# Altium PCB PCB1.PcbDoc
Units mil, origin at the board's own origin, x right, y up, seen from the top; angles counter-clockwise.
Board outline 3205.03 x 2070.03 mil, 2 copper layers (Top Layer, Bottom Layer); 42 components, 32 nets, 168 pads, 42 vias.
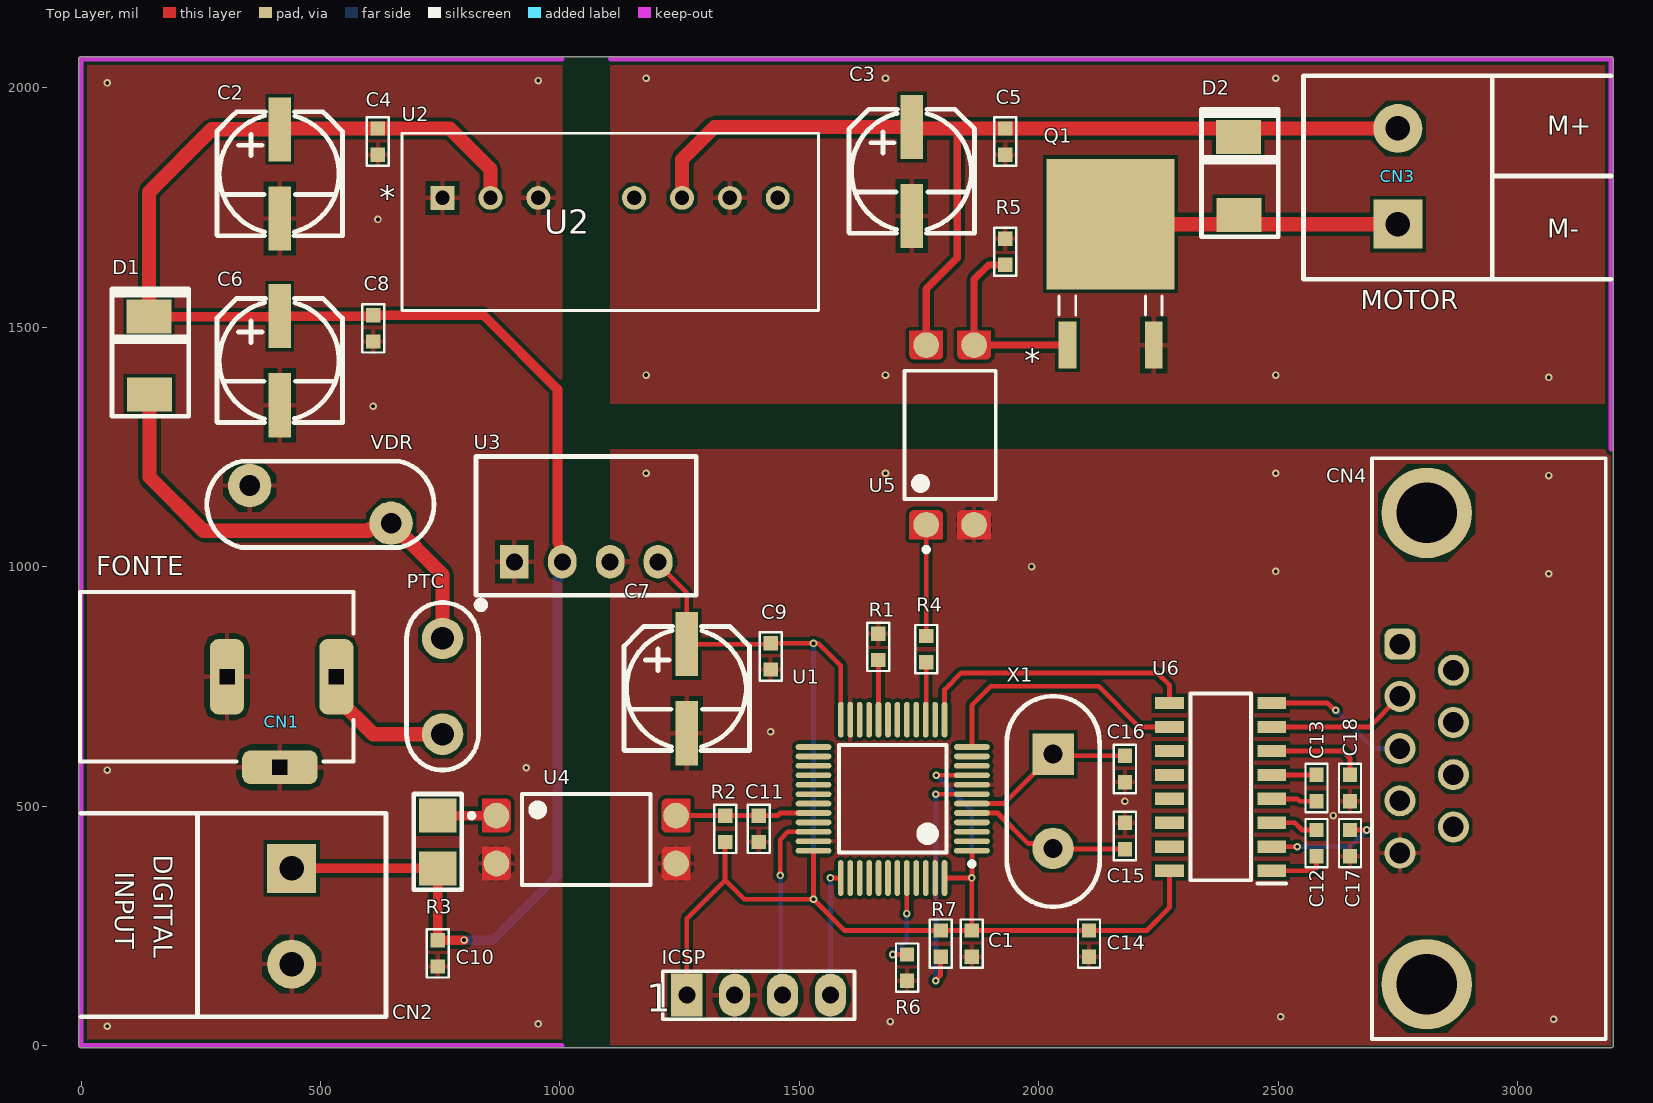
[diagram p0: Top Layer view]
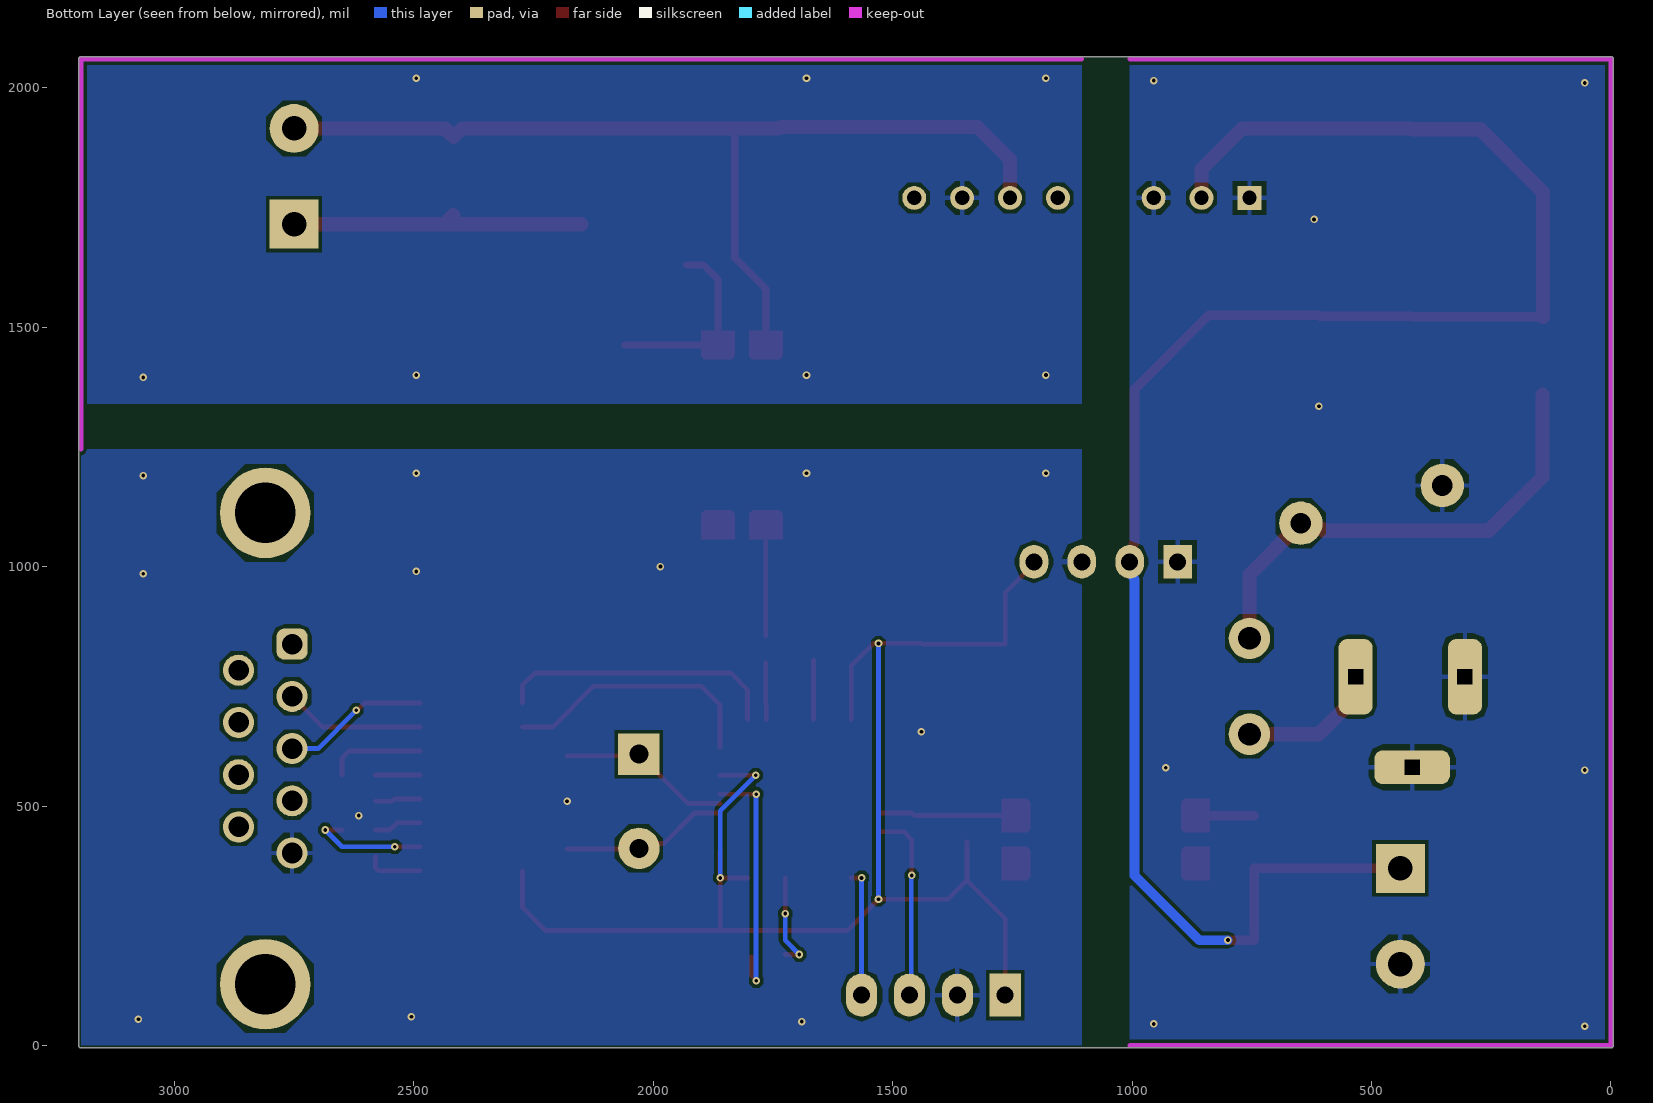
[diagram p1: Bottom Layer view, seen from below]

## Layer stack, top to bottom
Top Solder: solder mask 0.4, Solder Resist, Dk 3.5
Top Layer: signal copper 1.4
Dielectric 1: dielectric 12.6, FR-4, Dk 4.8
Bottom Layer: signal copper 1.4
Bottom Solder: solder mask 0.4, Solder Resist, Dk 3.5

## Board outline
-5.02,0 -5.01,2060 cw(c0,2060) 0,2065.02 3195,2065.02 cw(c3195,2060) 3200.02,2060 3200.02,0 cw(c3195,0) 3195,-5.01 0,-5.02 cw(c0,0)

## Design rules (kind name [scope] priority, off if disabled: settings)
Clearance [All] p1: gap=7 ignorepadtopadclearanceinfootprint=FALSE
PolygonConnect [All] p1: thpad.connectstyle=Relief thpad.reliefconductorwidth=10 thpad.reliefentries=4 thpad.polygonreliefangle="90 Angle" thpad.airgapwidth=10 smdpad.connectstyle=Relief smdpad.reliefconductorwidth=10 smdpad.reliefentries=4 smdpad.polygonreliefangle="90 Angle" smdpad.airgapwidth=10 via.connectstyle=Direct via.reliefconductorwidth=10 via.reliefentries=4 via.polygonreliefangle="90 Angle" via.airgapwidth=10
RoutingVias [All] p1: holewidth=28 width=50 viastyle="Through Hole" minholewidth=28 minwidth=50 maxholewidth=28 maxwidth=50
SolderMaskExpansion [All] p1: expansion=4 istentingtop=FALSE
Width [All] p1: maxlimit=40 minlimit=10 preferedwidth=10
30 further rules are at their usual default settings.

## Classes and differential pairs
component class Sheet2: C1 C12 C13 C14 C15 C16 C17 C18 CN4 ICSP R1 R6 R7 U1 U6 X1
component class Sheet1: C2 C3 C4 C5 C6 C7 C8 C9 C10 C11 CN1 CN2 CN3 D1 D2 PTC Q1 R2 R3 R4 R5 U2 U3 U4 U5 VDR

## Components (designator, comment, footprint, x,y, rotation, side; value= is the part's Value field where it differs from the comment)
C1 "100nF/100V" 0603C-GENERIC 1860,215 r180 top
C2 "10uF/50V" "CapE SMD D6.3 L5.8" 415,1820 r0 top
C3 "10uF/50V" "CapE SMD D6.3 L5.8" 1735,1825 r0 top
C4 "100nF/100V" 0603C-GENERIC 620,1890 r180 top
C5 "100nF/100V" 0603C-GENERIC 1930,1890 r180 top
C6 "10uF/50V" "CapE SMD D6.3 L5.8" 415,1430 r0 top
C7 "10uF/50V" "CapE SMD D6.3 L5.8" 1265,745 r0 top
C8 "100nF/100V" 0603C-GENERIC 610,1500 r180 top
C9 "100nF/100V" 0603C-GENERIC 1440,815 r180 top
C10 "100nF/100V" 0603C-GENERIC 745,195 r180 top
C11 "100nF/100V" 0603C-GENERIC 1415,455 r180 top
C12 "100nF/100V" 0603C-GENERIC 2580,425 r180 top
C13 "100nF/100V" 0603C-GENERIC 2580,540 r180 top
C14 "100nF/100V" 0603C-GENERIC 2105,210 r0 top
C15 "12pF/50V" 0603C-GENERIC 2180,435 r0 top
C16 "12pF/50V" 0603C-GENERIC 2180,580 r180 top
C17 "100nF/100V" 0603C-GENERIC 2650,420 r0 top
C18 "100nF/100V" 0603C-GENERIC 2650,535 r0 top
CN1 "FONTE" "Power Jack 694106301002" 283.35,770 r270 top
CN2 "BOTAO" AKZ700/2 440,270 r270 top
CN3 "MOTOR" AKZ700/2 2750,1815 r90 top
CN4 "DB9" 618009231121 2940,620 r90 top
D1 "MBRS360BT3G" DO-214AA(SMB) 145,1440 r90 top
D2 "MBRS360BT3G" DO-214AA(SMB) 2420,1815 r90 top
ICSP "Gravação in circuit" "BP 1x4" 1415,105 r0 top
PTC "0ZRN0100FF1E" "PTC LVR" 755,750 r90 top
Q1 "STD5NM50AG" DPAK-3_ONS 2150,1715 r0 top
R1 "10K" 0603R 1665,835 r180 top
R2 "10K" 0603R 1345,455 r180 top
R3 "470" "Res 1206" 745,425 r270 top
R4 "220R" 0603R 1765,830 r180 top value=10K
R5 "10K" 0603R 1930,1660 r180 top
R6 "10K" 0603R 1725,160 r0 top
R7 "10K" 0603R 1795,210 r0 top
U1 "STM32F103CBT6" LQFP-48 1695,515 r180 top value=STM32F103C8T6
U2 "ITQ2424SA" SIP8_ITQ2424_XPR 755,1770 r0 top
U3 "IL2405S" "IL SERIES" 1055,1010 r0 top
U4 "SFH618" FP-83911-MFG 1055,430 r0 top
U5 "SFH618" FP-83911-MFG 1815,1275 r90 top
U6 "MAX3232CSE" SOIC127P600X175-16N 2380,540 r180 top
VDR "S10K30" "VDR D12H14.5-7.5" 500,1130 r0 top
X1 "8MHz" "Cristal HC49S" 2030,510 r270 top

## Footprints (in the part's own frame and the unit in brackets; to place one, negate y for a bottom-side part, rotate by r counter-clockwise, add the part's x,y. Pads: shape width x height; smd on the part's side, far side on the other; paste and mask are expansions set on the pad)
0603C-GENERIC [mil]
  rect 30x30 smd: 1(0,30) 2(0,-25)
  silkscreen extent -23,-48 23,53, body extent -16,-28 16,34, height 12
0603R [mil]
  rect 30x30 smd: 1(0,30) 2(0,-25)
  silkscreen extent -23,-48 23,53, body extent -16,-31 16,32, height 18
618009231121 [mm] "9 pins, right angled, 8.08mm, with hex screw"
  rrect50% 1.65x1.65 hole 1.09: 1(5.54,4.72)
  round 1.65 hole 1.09: 2(2.77,4.72) 3(0,4.72) 4(-2.77,4.72) 5(-5.54,4.72) 6(4.155,1.88) 7(1.385,1.88) 8(-1.385,1.88) 9(-4.155,1.88)
  round 4.8 hole 3.2: M1(-12.5,3.3) M2(12.5,3.3)
  silkscreen extent -15.4,-6.2 15.4,6.2, body extent -15.4,-12.2 15.4,6.2, height 12.55
AKZ700/2 [mm]
  rect 2.6x2.6 hole 1.3: 1(-2.54,0)
  round 2.6 hole 1.3: 2(2.54,0)
  silkscreen extent -5.46,-5 5.33,5, body extent -5.53,-4.95 5.28,5.55, height 19.2
"BP 1x4" [mil]
  rect 65x90 hole 35.43: 1(-150,0)
  oval 65x90 hole 35.43: 2(-50,0) 3(50,0) 4(150,0)
  silkscreen extent -200,-50 200,50, body extent -200,-50 200,50, height 234
"CapE SMD D6.3 L5.8" [mm]
  rect 1.2x3.4 smd: 1(0,2.362) 2(0,-2.362)
  silkscreen extent -3.33,-3.28 3.33,3.3, body extent -3.3,-3.5 3.3,3.5, height 5.4
"Cristal HC49S" [mm]
  rect 2.2x2.2 hole 1: 1(-2.5,0)
  round 2.2 hole 1: 2(2.5,0)
  silkscreen extent -5.57,-2.46 5.6,2.47, body extent -5.68,-2.29 5.68,2.36, height 3.5
DO-214AA(SMB) [mil]
  rect 70.87x94.49 smd: 1(-81,2) 2(82,3)
  silkscreen extent -126,-80 140,80, body extent -110,-75 110,80, height 110
DPAK-3_ONS [mil]
  rect 37x98 smd paste+0 mask+0: 1(-90.16,-252.5) 2(90.16,-252.5)
  rect 267x273 smd paste+0 mask+0: 3(0,0)
  silkscreen extent -108,-190 108,-150, body extent -133,-288 133,123, height 67
FP-83911-MFG [mm]
  round 1.368 smd paste+0 mask+0: 1(-4.765,1.27) 2(-4.765,-1.27) 3(4.765,-1.27) 4(4.765,1.27)
  Top Layer region: -5.525,2.16 -4.255,2.16 -4.159,2.141 -4.078,2.087 -4.024,2.006 -4.005,1.91 -4.005,1.91 -4.005,0.63 -4.038,0.505 -4.13,0.413 -4.255,0.38 -4.255,0.38 -5.525,0.38
  Top Layer region: -5.525,-0.38 -4.255,-0.38 -4.159,-0.399 -4.078,-0.453 -4.024,-0.534 -4.005,-0.63 -4.005,-0.63 -4.005,-1.91 -4.024,-2.006 -4.078,-2.087 -4.159,-2.141 -4.255,-2.16 -4.255,-2.16 -5.525,-2.16
  Top Layer region: 5.525,-2.16 4.255,-2.16 4.159,-2.141 4.078,-2.087 4.024,-2.006 4.005,-1.91 4.005,-1.91 4.005,-0.63 4.024,-0.534 4.078,-0.453 4.159,-0.399 4.255,-0.38 4.255,-0.38 5.525,-0.38
  Top Layer region: 5.525,0.38 4.255,0.38 4.159,0.399 4.078,0.453 4.024,0.534 4.005,0.63 4.005,0.63 4.005,1.91 4.024,2.006 4.078,2.087 4.159,2.141 4.255,2.16 4.255,2.16 5.525,2.16
  silkscreen extent -6.2,-2.41 3.4,2.41, body extent -5.63,-2.51 5.63,2.51, height 0.25
"IL SERIES" [mil]
  rect 60x70 hole 35.43: 1(-150,0)
  oval 60x70 hole 35.43: 2(-50,0) 3(50,0) 4(150,0)
  silkscreen extent -230,-100 230,220, body extent -230,-70 230,220, height 400
LQFP-48 [mm] "TSQFP, 48-Leads, Body 9,0x9,0mm (max), Pitch 0,50mm, IPC Medium Density"
  oval 1.9x0.3 smd: 1(-4.2,2.75) 2(-4.2,2.25) 3(-4.2,1.75) 4(-4.2,1.25) 5(-4.2,0.75) 6(-4.2,0.25) 7(-4.2,-0.25) 8(-4.2,-0.75) 9(-4.2,-1.25) 10(-4.2,-1.75) 11(-4.2,-2.25) 12(-4.2,-2.75) 25(4.2,-2.75) 26(4.2,-2.25) 27(4.2,-1.75) 28(4.2,-1.25) 29(4.2,-0.75) 30(4.2,-0.25) 31(4.2,0.25) 32(4.2,0.75) 33(4.2,1.25) 34(4.2,1.75) 35(4.2,2.25) 36(4.2,2.75)
  oval 0.3x1.9 smd: 13(-2.75,-4.2) 14(-2.25,-4.2) 15(-1.75,-4.2) 16(-1.25,-4.2) 17(-0.75,-4.2) 18(-0.25,-4.2) 19(0.25,-4.2) 20(0.75,-4.2) 21(1.25,-4.2) 22(1.75,-4.2) 23(2.25,-4.2) 24(2.75,-4.2) 37(2.75,4.2) 38(2.25,4.2) 39(1.75,4.2) 40(1.25,4.2) 41(0.75,4.2) 42(0.25,4.2) 43(-0.25,4.2) 44(-0.75,4.2) 45(-1.25,4.2) 46(-1.75,4.2) 47(-2.25,4.2) 48(-2.75,4.2)
  silkscreen extent -4.33,-2.85 2.85,3.57, body extent -4.5,-4.5 4.5,4.5, height 1.5
"Power Jack 694106301002" [mm] "DC Power Jack Right Angled(6.4)"
  rrect50% 4x1.8 hole 0.8 square: 1(0,6.35) 2(0,0.55)
  rrect50% 1.8x4 hole 0.8 square: 3(4.8,3.35)
  silkscreen extent -4.5,-7.25 4.5,7.25, body extent -4.5,-7.25 5,7.25, height 10.75
"PTC LVR" [mm]
  round 2.2 hole 1.2: 1(-2.54,0) 2(2.54,0)
  silkscreen extent -4.44,-1.91 4.44,1.91, body extent -4,-1.14 4,1.37, height 11
"Res 1206" [mm]
  rect 1.8x2 smd: 1(-1.4,0) 2(1.4,0)
  silkscreen extent -2.54,-1.27 2.54,1.27, body extent -1.6,-0.77 1.6,0.83, height 1
SIP8_ITQ2424_XPR [mil]
  rect 50x50 hole 30 paste-99999 mask+0: 1(0,0)
  round 50 hole 30 paste-99999 mask+0: 2(100,0) 3(200,0) 5(400,0) 6(500,0) 7(600,0) 8(700,0)
  silkscreen extent -85,-235 785,135, body extent -80,-180 780,180, height 420
SOIC127P600X175-16N [mm]
  rect 1.525x0.65 smd: 1(-2.712,4.445) 2(-2.712,3.175) 3(-2.712,1.905) 4(-2.712,0.635) 5(-2.712,-0.635) 6(-2.712,-1.905) 7(-2.712,-3.175) 8(-2.712,-4.445) 9(2.712,-4.445) 10(2.712,-3.175) 11(2.712,-1.905) 12(2.712,-0.635) 13(2.712,0.635) 14(2.712,1.905) 15(2.712,3.175) 16(2.712,4.445)
  silkscreen extent -3.47,-4.95 1.6,5.12, body extent -3,-4.95 3,4.95, height 1.75
"VDR D12H14.5-7.5" [mm]
  round 2.3 hole 1.1: 1(-3.75,1) 2(3.75,-1)
  silkscreen extent -6.02,-2.29 6.02,2.29, body extent -5.97,-1.93 6.03,1.87, height 14

## Part data
C1 C4 C5 C8 C9 C10 C11 C12 C13 C14 C17 C18: library part "Cap Ceramico SMD", "Capacitor Cerâmico SMD", Protheus=E3CSC100N0002
C2 C3 C6 C7: library part "Cap Eletrolitico", "Capacitor Eletrolítico Radial SMD", Protheus=E3CS3010U0003
C15 C16: library part "Cap Ceramico SMD", "Capacitor Cerâmico", Pin Count=2, Protheus=E3CSC012P0002
CN1: library part "DC Power Jack", "DC Power Jack", Current Rating=5A, Flammability Rating="UL94 V-0", Insulation Resistance=100MΩ, Max Operating Temperature=85°C, Min Operating Temperature=-40°C, Operating Supply Voltage=24V, Part Number=694106301002, Connector Type=Power, Contact Gender=Female, Contact Material="Gold, Tin", Contact Plating=Tin, Height=11mm, Housing Material=Polyamide, Mount="Through Hole", Mouser=710-694106301002, NexarPartId=52676100, Number of Contacts=3, Packaging=Bulk, REACH SVHC=Unknown, RoHS=Compliant, Shielding=Unshielded, Termination="Through Hole", Voltage Rating=24V
CN2 CN3: library part "1x2 Pinos", "2 pinos"
CN4: "Connector DB9"
D1 D2: library part BAT54, "Schottky Barrier Diode", Manufacturer 1="Fairchild Semiconductor", Supplier Part Number 1=BAT54FSCT-ND, Manufacturer Part Number 1=BAT54, Montar=Sim, Protheus=E2DIOD0000018
ICSP: library part "BP 1x4 Pinos", "Barra de Pinos Macho 4p 11,2mm 180º", Protheus=E5CNM18004003
PTC: library part LVR008N, "Fusível Thermistor PTC", Protheus=E2DIVE0000059
Q1: library part BSS138, "Transistor N-Channel", Protheus=E2TRAN0000008
R1 R2 R3 R4 R5 R6 R7: library part E3RSM010K0001, "Resistor Metal Filme"
  R1 R2 R4 R5 R6 R7: Protheus=E3RSM010K0002
  R3: Protheus=E3RSM430R0001
U1: library part STM32F103C8T6TR, Part Number=E2UMIC0000012, Protheus=E2UMIC0000012
U2: "No Description Available", Manufacturer_Name="XP Power", Copyright="Copyright (C) 2026 Ultra Librarian. All rights reserved.", Manufacturer_Part_Number=ITQ2424SA, RefDes=RefDes, Type=Type
U3: "Conversor DC/DC 2W", Part Number=E2CONV0000006
U4 U5: library part CMP-00026-00002-1, "Optocoupler Dc-in 1-CH Transistor Dc-out 4-PIN PDIP SMD T/r", Protheus=E2UACO0000007
U6: library part MAX232CSE, "Integrated Circuit", Protheus=E2UGER0000019
VDR: library part "VDR 1000L160", "Varistor 30VAC/48VDC", Protheus=E2VARI0000001
X1: library part Cristal_CM200C, "Cristal", Protheus=E2CRST0000004

## Via types
v1: diameter 15.75, hole 7.87, Top Layer to Bottom Layer, 42 vias

## Nets (pads, with @x,y where several pads share a name; then routed paths per layer and width w, separated by ;. In a path a pad name is that pad's centre, name@x,y a point inside that pad or via, vN(x,y) a via of type N, cw(c..) or ccw(c..) an arc to the next point about the centre after c; other vN are vias at no path point)
5VA: C3.1 C5.2 CN3.2 D2.2 U2.6 U5.4 | length 2098.6
  Top Layer w10: C3.1 C3.1@1738,1915
  Top Layer w15: U5.4 1765,1580 1830,1645 1830,1915
  Top Layer w30: U2.6 1255,1850 1323,1918 C3.1 ; C3.1@1738,1915 1830,1915 C5.2 2399,1915 D2.2 2426,1906 2435,1915 CN3.2
5VD: C1.2 C7.1 C9.2 C14.1 ICSP.1 R2.1 R7.1 U1.1 U1.9 U1.24 U1.36 U1.48 U3.4 U6.16 | length 3252.1
  Top Layer w10: U3.4 1205,1005 1265,945 C7.1 1438,838 C9.2 1540,840 1586.73,793.27 U1.24 ; ICSP.1 1265,265 1345,345 ; R2.1 1345,345 ; U1.36 v1(1529.65,305.35) ; v1(1785.79,564.21) U1.9 ; U1.48 v1@1860,349.65 ; U1.1 1860.35,350 v1@1860,349.65 ; U6.16 2273.23,288.23 2225,240 C14.1 C1.2 ; 1345,345 1384.65,305.35 v1(1529.65,305.35) ; v1(1529.65,305.35) 1595,240 C1.2 ; C1.2 v1@1860,349.65
  Bottom Layer w10: v1(1529.65,305.35) v1(1529.65,839.65) ; v1(1785.79,564.21) 1860,490 v1(1860,350)
BOOT: R6.1 U1.44 | length 201.9
  Top Layer w10: v1(1695,190) R6.1 ; v1(1724.53,275.47) U1.44
  Bottom Layer w10: v1(1695,190) 1724.53,219.53 v1(1724.53,275.47)
BOT: C11.2 R2.2 U1.32 U4.4 | length 289.3
  Top Layer w10: U4.4 R2.2 C11.2 1455,480 1460.47,485.47 U1.32
DCLK: ICSP.4 U1.37 | length 266.9
  Top Layer w10: v1(1565,350) 1586.38,350 U1.37
  Bottom Layer w10: ICSP.4 v1(1565,350)
DIO: ICSP.3 U1.34 | length 403.4
  Top Layer w10: v1(1460,355) 1460,430 1476.1,446.1 U1.34
  Bottom Layer w10: v1(1460,355) 1461.1,353.9 1461.1,108.9 ICSP.3
GND: U6.15
GNDA: C3.2 C5.1 Q1.2 R5.2 U2.7
  other v1: 3065,1395 1180,1400 1680,1400 2495,1400 1180,2020 1680,2020 2495,2020
GNDD: C1.1 C7.2 C9.1 C11.1 C14.2 C15.1 C16.1 C17.2 C18.2 CN4.5 ICSP.2 R1.2 R6.2 U1.8 U1.23 U1.35 U1.47 U3.3 U4.3 U5.2
  other v1: 1690,50 3075,55 2505,60 2615,480 2180,510 1440,655 3065,985 2495,990 1985,1000 3065,1190 1180,1195 1680,1195 2495,1195
GNDP: C2.2 C4.1 C6.2 C8.1 C10.1 CN1.2 CN1.3 CN2.2 U2.1 U2.3 U3.1 U4.2 VDR.1
  other v1: 55,40 955,45 55,575 930,580 610,1335 620,1725 55,2010 955,2015
MOTOR: R4.1 U1.15 | length 120.1
  Top Layer w10: U1.15 1763.9,712.34 1765,713.44 R4.1
NetC12_1: C12.1 U6.1 | length 119.8
  Top Layer w10: U6.1 2574.14,365 2580,370.86 C12.1
NetC12_2: C12.2 U6.3 | length 99.4
  Top Layer w10: U6.3 2535,465 2550,450 C12.2
NetC13_1: C13.1 U6.4 | length 95.3
  Top Layer w10: U6.4 2540,515 2545,510 C13.1
NetC13_2: C13.2 U6.5 | length 93.2
  Top Layer w10: U6.5 C13.2
NetC17_1: C17.1 U6.2 | length 247.7
  Top Layer w10: U6.2 v1(2540,415) ; C17.1 v1(2685,450)
  Bottom Layer w10: v1(2540,415) 2650,415 v1(2685,450)
NetC18_1: C18.1 U6.6 | length 204.4
  Top Layer w10: U6.6 2635,615 2650,600 C18.1
NetCN1_1: CN1.1 PTC.1 | length 296.7
  Top Layer w10: CN1.1@533.35,726.69 CN1.1
  Top Layer w30: CN1.1@533.35,726.69 610.04,650 PTC.1
NetCN3_1: CN3.1 D2.1 Q1.3 | length 654.5
  Top Layer w10: D2.1@2437,1715 D2.1@2448.43,1703.57
  Top Layer w30: Q1.3 D2.1@2448.43,1715 ; D2.1 2437,1715 D2.1@2448.43,1715 ; CN3.1 D2.1@2448.43,1715
NetD1_1: D1.1 PTC.2 VDR.2 | length 1014.6
  Top Layer w30: D1.1 143,1187 255,1075 599.79,1075 603.83,1079.04 636.05,1079.04 VDR.2 755,983.27 PTC.2
NetQ1_1: Q1.1 R5.1 U5.3 | length 409.7
  Top Layer w10: Q1.1@2059.74,1462.6 Q1.1
  Top Layer w15: R5.1 1895,1630 1865,1600 U5.3 Q1.1@2059.74,1462.6
NetR1_1: R1.1 U1.20 | length 124.8
  Top Layer w10: R1.1 1665.47,804.53 U1.20
NetR3_1: R3.1 U4.1 | length 122.5
  Top Layer w10: R3.1 R3.1@745.12,480
  Top Layer w20: R3.1@745.12,480 U4.1
NetR4_2: R4.2 U5.1 | length 232.4
  Top Layer w10: R4.2 U5.1
OSC_IN: C15.2 U1.5 X1.2 | length 350.9
  Top Layer w10: U1.5 1913.85,485.47 1977.65,421.68 2019.89,421.68 2031.57,410 C15.2
OSC_OUT: C16.2 U1.6 X1.1 | length 363.8
  Top Layer w10: U1.6 1926.73,505.16 X1.1 2033.43,605 C16.2
RESET: R7.2 U1.7 | length 518.8
  Top Layer w10: v1(1785.16,135.16) 1785.16,136.71 1795,146.56 R7.2 ; v1(1785.16,524.84) U1.7
  Bottom Layer w10: v1(1785.16,135.16) v1(1785.16,524.84)
RS232_RX: CN4.2 U6.7 | length 293.9
  Top Layer w10: U6.7 2690.12,665 CN4.2
RS232_TX: CN4.3 U6.8 | length 306.8
  Top Layer w10: U6.8 2603.44,715 2618.44,700 v1(2620,700)
  Bottom Layer w10: v1(2620,700) 2700,620 CN4.3
UART2_RX: U1.13 U6.9 | length 594.9
  Top Layer w10: U1.13 1803.27,743.27 1838.04,778.04 2246.96,778.04 2273.23,751.77 U6.9
UART2_TX: U1.12 U6.10 | length 551.6
  Top Layer w10: U1.12 1860.35,710.35 1900,750 2125,750 2210,665 U6.10
VIN: C2.1 C4.2 C6.1 C8.2 C10.2 CN2.1 D1.2 R3.2 U2.2 U3.2 | length 3822.6
  Top Layer w10: C8.2@608,1523 C8.2 ; R3.2@744.88,370 R3.2
  Top Layer w20: D1.2 C6.1@415,1522 ; C6.1 C8.2@608,1523 ; CN2.1 R3.2@744.88,370 ; C8.2 840,1525 995,1370 995,1049.86 997.35,1047.51 997.35,1017.65 U3.2 ; R3.2 C10.2 v1(800,220)
  Top Layer w30: D1.2 142,1782 273,1913 C2.1 ; C2.1@417,1915 770,1915 855,1830 U2.2
  Bottom Layer w20: v1(800,220) 860,220 995,355 995,973.28 997.35,975.63 997.35,1002.35 U3.2
pads on no net: CN4.1 CN4.4 CN4.6 CN4.7 CN4.8 CN4.9 CN4.M1 CN4.M2 U1.2 U1.3 U1.4 U1.10 U1.11 U1.14 U1.16 U1.17 U1.18 U1.19 U1.21 U1.22 U1.25 U1.26 U1.27 U1.28 U1.29 U1.30 U1.31 U1.33 U1.38 U1.39 U1.40 U1.41 U1.42 U1.43 U1.45 U1.46 U2.5 U2.8 U6.11 U6.12 U6.13 U6.14

## Polygon pours and split planes (outlines as drawn)
GNDP on Top Layer "NONET_L-01_P-001" (solid, pour order 0): 0,2060 1005,2060 1005,0 0,0
GNDA on Top Layer "NONET_L-01_P-001" (solid, pour order 1): 1105,2060 1105,1340 3195,1340 3195,2060
GNDD on Top Layer "NONET_L-01_P-001" (solid, pour order 2): 1105,1245 3195,1245 3195,0 1105,0
GNDA on Bottom Layer "NONET_L-01_P-001" (solid, pour order 5): 1105,2060 1105,1340 3195,1340 3195,2060
GNDD on Bottom Layer "NONET_L-01_P-001" (solid, pour order 4): 1105,1245 3195,1245 3195,0 1105,0
GNDP on Bottom Layer "NONET_L-01_P-001" (solid, pour order 3): 0,2060 1005,2060 1005,0 0,0

## Keep-outs
Keep-Out Layer:
  lines w10: 1005,0 0,0 0,2060 1005,2060 ; 1105,2060 3195,2060 3195,1245

## Silkscreen, mask and mechanical layers (free items; w line width, h text height)
Top Overlay:
  lines w10: 0,60 243.15,60 ; 0,485 243.15,485 ; 2946.82,1815.56 3194.97,1815.56 ; 2946.85,1600 3195,1600 ; 2946.85,2025 3195,2025
  text "M+" at 3062,1902 h40
  text "M-" at 3062,1687 h40
  text "MOTOR" at 2672,1537 h40
  text "FONTE" at 32,982 h40
  text "DIGITAL" at 152,398 h40 r270
  text "INPUT" at 72,363 h40 r270
Mechanical 1:
  lines w10: 0,0 3195,0 3195,2060 0,2060 0,0

## Text inside footprints (layer, text, board x,y; h text height)
CN4: Top 3D Body "PCB Edge" at 3237.24,635.75 h40 r90
ICSP: Top Overlay "1" at 1180,70 h59.06
Q1: Top Overlay "*" at 1970,1405 h50; Mechanical 13 "*" at 2047.34,1577.5 h50
U2: Top Overlay "*" at 622.5,1745 h50; Mechanical 13 "*" at 672.5,1745 h50